# Altium PCB DS12C887.PcbDoc
Units mil, origin at the board's own origin, x right, y up, seen from the top; angles counter-clockwise.
Board outline 6000 x 4000 mil, 2 copper layers (Top Layer, Bottom Layer); 21 components, 31 nets, 133 pads, 3 vias.
Unrouted connection lines stored in the file: 1.
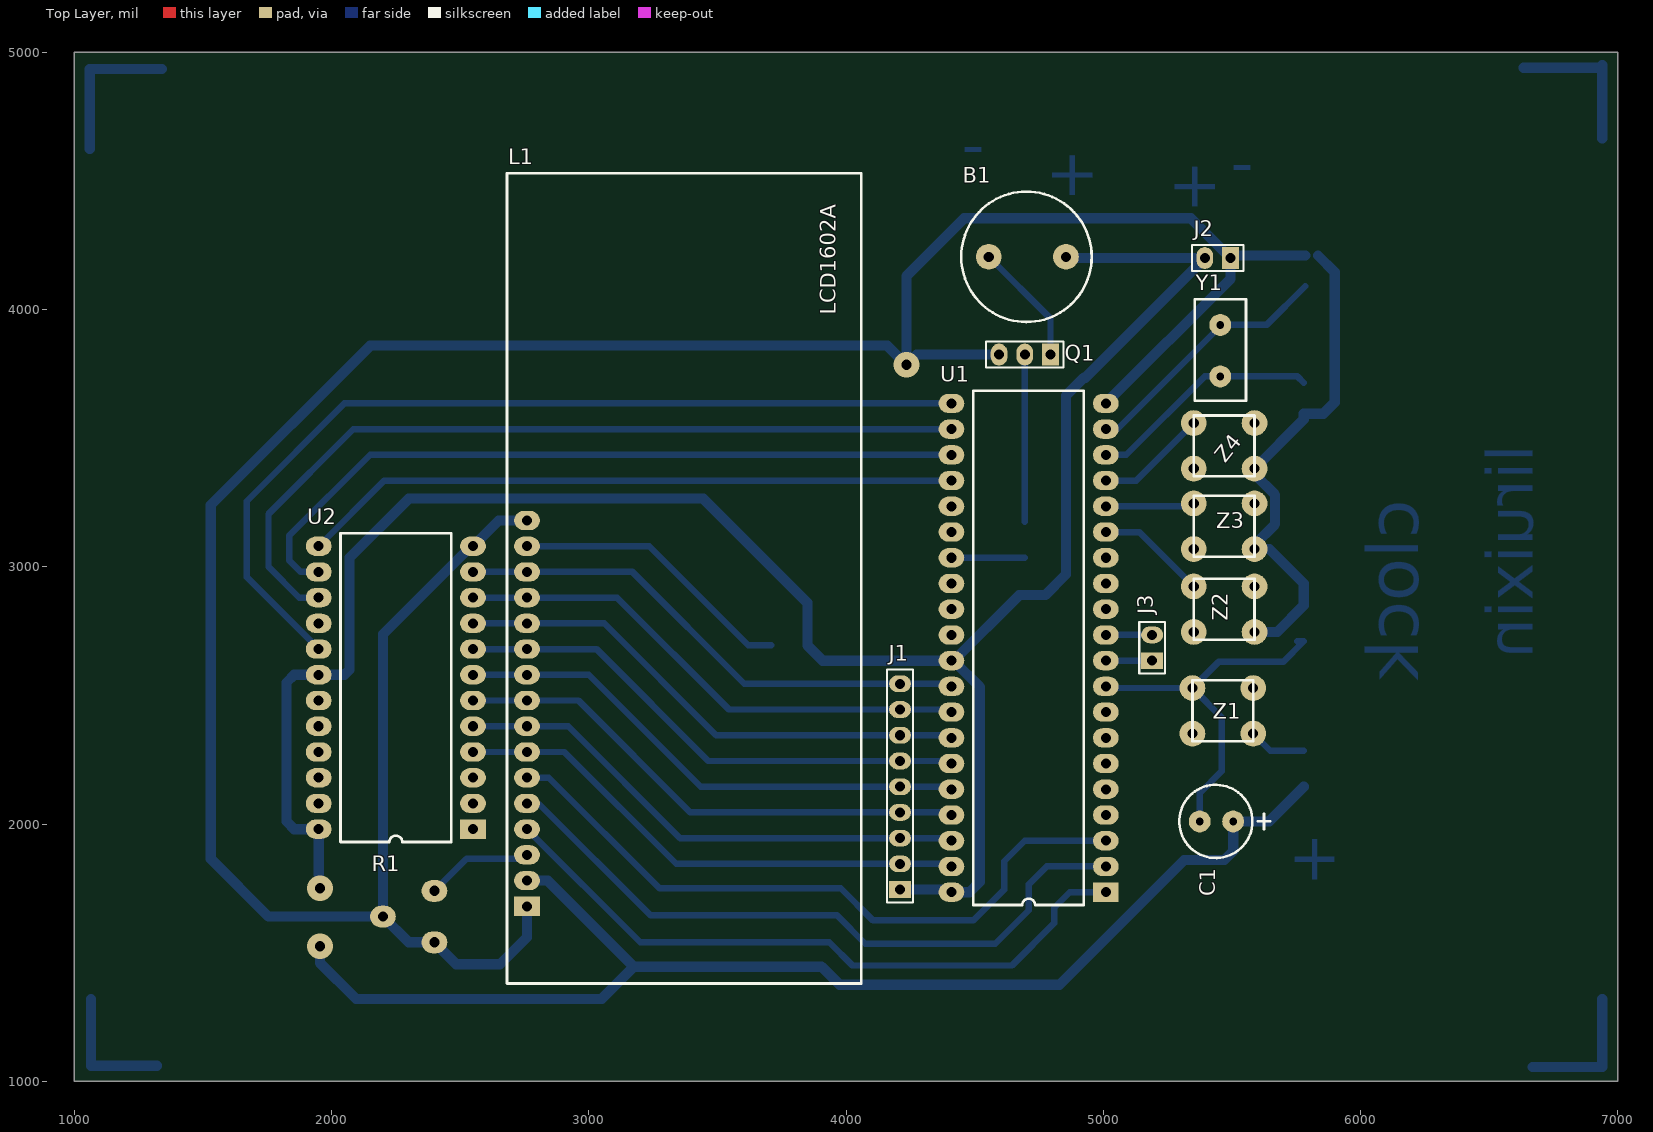
[diagram p0: Top Layer view]
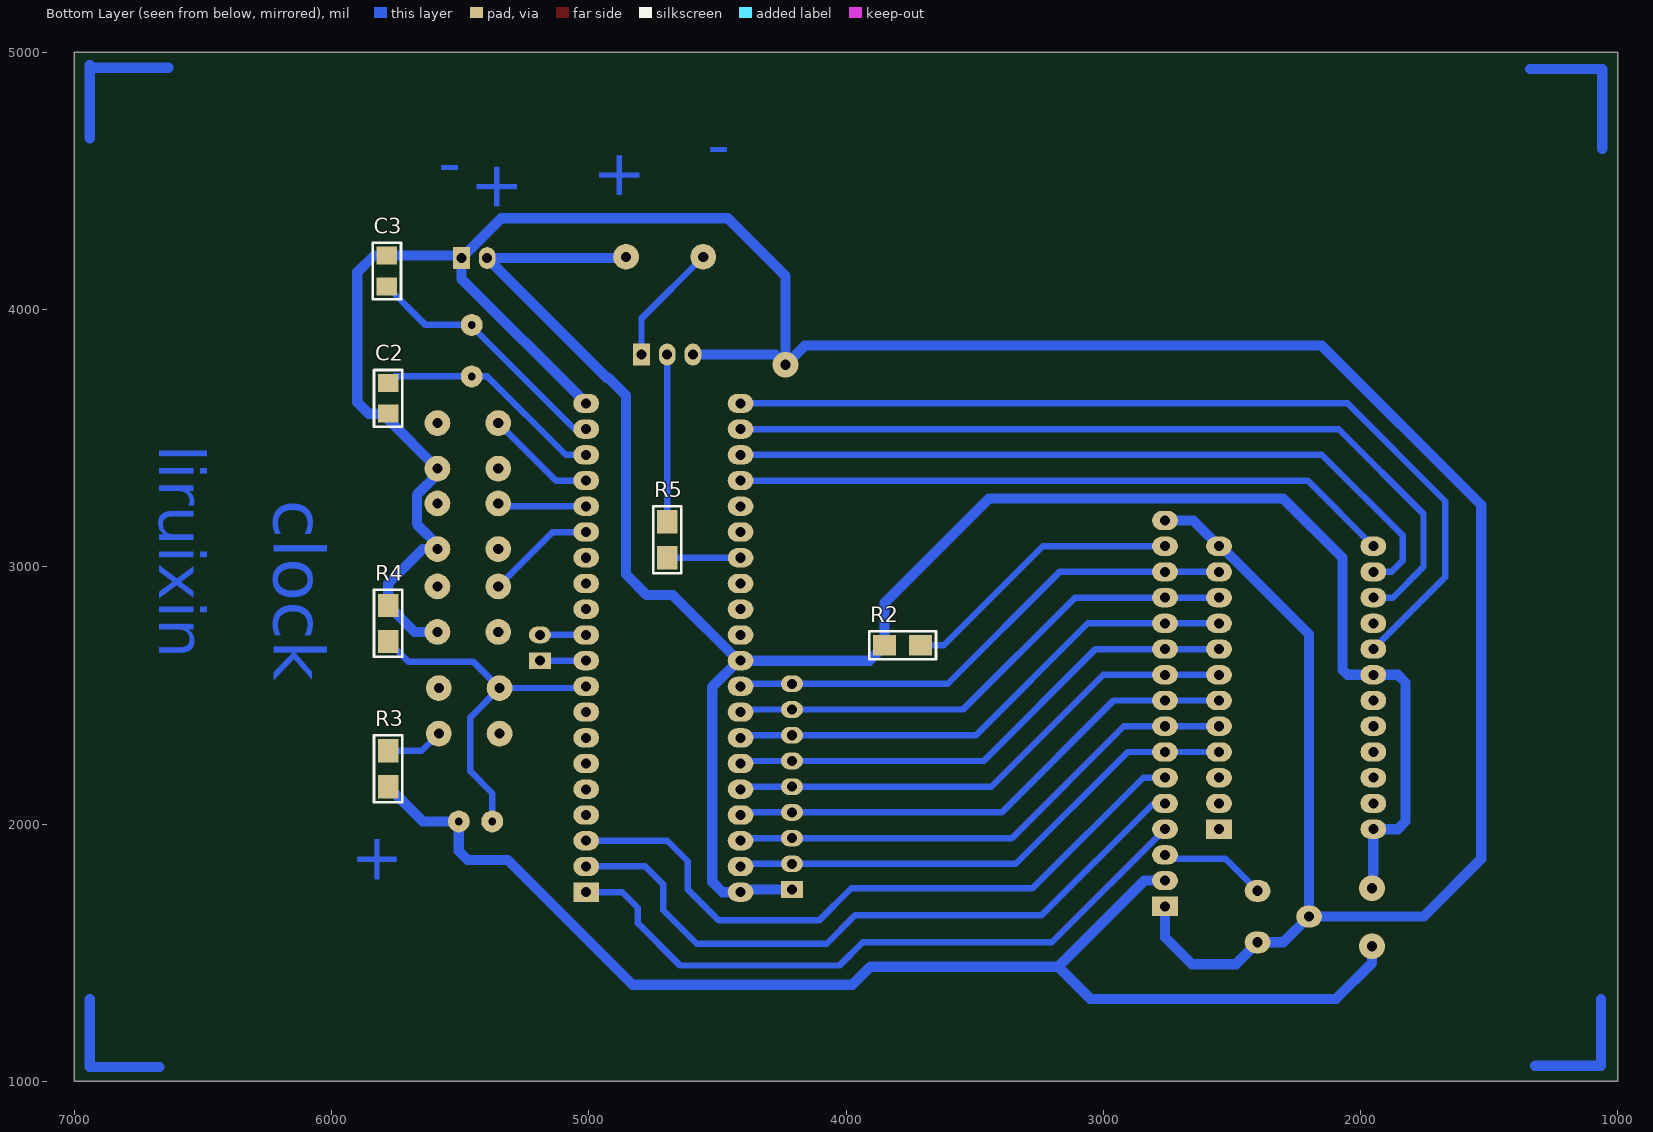
[diagram p1: Bottom Layer view, seen from below]

## Layer stack, top to bottom
Top Solder: solder mask 0.4, Solder Resist, Dk 3.5
Top Layer: signal copper 1.4
Dielectric 1: dielectric 12.6, FR-4, Dk 4.8
Bottom Layer: signal copper 1.4
Bottom Solder: solder mask 0.4, Solder Resist, Dk 3.5

## Board outline
1000,1000 7000,1000 7000,5000 1000,5000

## Design rules (kind name [scope] priority, off if disabled: settings)
Clearance [All] p1: gap=10
PolygonConnect [All] p1: connectstyle=Relief reliefconductorwidth=10 reliefentries=4 polygonreliefangle="90 Angle" airgapwidth=10
RoutingVias [All] p1: holewidth=28 width=50 viastyle="Through Hole" minholewidth=28 minwidth=50 maxholewidth=28 maxwidth=50
SolderMaskExpansion [All] p1: expansion=4
Width [All] p1: maxlimit=50 minlimit=20 preferedwidth=20
29 further rules are at their usual default settings.

## Components (designator, comment, footprint, x,y, rotation, side; value= is the part's Value field where it differs from the comment)
B1 "Buzzer" BUZZER 4695,4205 r0 top
C1 "CAP+" CAP+DIP 5440,2010 r180 top
C2 "CAP" CAP 5780,3660 r270 bottom
C3 "CAP" CAP 5785,4145 r90 bottom
J1 "Header1x9" HEADER1X9 4210,2145 r90 top
J2 "Header1x2" HEADER1X2 5445,4200 r180 top
J3 "Header1x2" HEADER1X2 5190,2685 r90 top
L1 "LCD1602A" LCD1602A 3360,2980 r90 top
Q1 "Header1x3" HEADER1X3 4695,3825 r180 top
R1 "RES-C" RES-Change-T 2300,1640 r90 top
R2 "RES" RES 3780,2695 r180 bottom
R3 "RES" RES 5780,2215 r270 bottom
R4 "RES" RES 5780,2780 r270 bottom
R5 "RES" RES 4695,3105 r90 bottom
U1 "89C51/52" DIP-40 4725,2680 r180 top
U2 "DS12C887" DIP-24 2260,2535 r180 top
Y1 "XTAL" XTAL 5460,3840 r270 top
Z1 "Button-Z" SW-PB-Z 5465,2440 r180 top
Z2 "Button-Z" SW-PB-Z 5470,2835 r180 top
Z3 "Button-Z" SW-PB-Z 5470,3157.5 r180 top
Z4 "Button-Z" SW-PB-Z 5470,3470 r180 top

## Footprints (in the part's own frame and the unit in brackets; to place one, negate y for a bottom-side part, rotate by r counter-clockwise, add the part's x,y. Pads: shape width x height; smd on the part's side, far side on the other; paste and mask are expansions set on the pad)
BUZZER [mil]
  round 100 hole 39: 1(-140,0) 2(160,0)
  silkscreen extent -247,-253 260,253
CAP [mil]
  rect 70x80 smd: 1(-55,0) 2(65,0)
  silkscreen extent -105,-55 115,55
CAP+DIP [mil]
  round 85 hole 30: 1(-65,0) 2(65,0)
  silkscreen extent -210,-142 144,142
DIP-24 [mil]
  rect 100x75 hole 39: 1(-290,555)
  oval 100x75 hole 39: 2(-290,455) 3(-290,355) 4(-290,255) 5(-290,155) 6(-290,55) 7(-290,-45) 8(-290,-145) 9(-290,-245) 10(-290,-345) 11(-290,-445) 12(-290,-545) 13(310,-545) 14(310,-445) 15(310,-345) 16(310,-245) 17(310,-145) 18(310,-45) 19(310,55) 20(310,155) 21(310,255) 22(310,355) 23(310,455) 24(310,555)
  silkscreen extent -205,-595 225,605
DIP-40 [mil]
  rect 100x75 hole 39: 1(-285,945)
  oval 100x75 hole 39: 2(-285,845) 3(-285,745) 4(-285,645) 5(-285,545) 6(-285,445) 7(-285,345) 8(-285,245) 9(-285,145) 10(-285,45) 11(-285,-55) 12(-285,-155) 13(-285,-255) 14(-285,-355) 15(-285,-455) 16(-285,-555) 17(-285,-655) 18(-285,-755) 19(-285,-855) 20(-285,-955) 21(315,-955) 22(315,-855) 23(315,-755) 24(315,-655) 25(315,-555) 26(315,-455) 27(315,-355) 28(315,-255) 29(315,-155) 30(315,-55) 31(315,45) 32(315,145) 33(315,245) 34(315,345) 35(315,445) 36(315,545) 37(315,645) 38(315,745) 39(315,845) 40(315,945)
  silkscreen extent -200,-1005 230,995
HEADER1X2 [mil]
  rect 65x85 hole 39: 1(-50,0)
  oval 65x85 hole 39: 2(50,0)
  silkscreen extent -100,-50 100,50
HEADER1X3 [mil]
  rect 65x85 hole 39: 1(-100,0)
  oval 65x85 hole 39: 2(0,0) 3(100,0)
  silkscreen extent -150,-50 150,50
HEADER1X9 [mil]
  rect 65x85 hole 39: 1(-400,0)
  oval 65x85 hole 39: 2(-300,0) 3(-200,0) 4(-100,0) 5(0,0) 6(100,0) 7(200,0) 8(300,0) 9(400,0)
  silkscreen extent -450,-50 455,50
LCD1602A [mil]
  rect 75x100 hole 39: 1(-1300,600)
  oval 75x100 hole 39: 2(-1200,600) 3(-1100,600) 4(-1000,600) 5(-900,600) 6(-800,600) 7(-700,600) 8(-600,600) 9(-500,600) 10(-400,600) 11(-300,600) 12(-200,600) 13(-100,600) 14(0,600) 15(100,600) 16(200,600)
  silkscreen extent -1600,-700 1550,678
RES [mil]
  rect 90x80 smd: 1(-70,0) 2(70,0)
  silkscreen extent -130,-55 130,55
RES-Change-T [mil]
  oval 85x100 hole 40: 1(-100,-100) 2(100,-100) 3(0,100)
SW-PB-Z [mm]
  round 2.54 hole 0.991: 1(-3,2.25) 2(3,-2.25) ""(-3,-2.25) ""(3,2.25)
  silkscreen extent -3,-3 3,3
XTAL [mil]
  round 85 hole 30: 1(-100,-5) 2(100,-5)
  silkscreen extent -200,-105 195,95

## Part data
C1: library part CAP+DIP
R1: library part RES-Change-T
Z1 Z2 Z3 Z4: library part SW-Button-Z

## Via types
v1: diameter 100, hole 40, Top Layer to Bottom Layer, 3 vias

## Nets (pads, with @x,y where several pads share a name; then routed paths per layer and width w, separated by ;. In a path a pad name is that pad's centre, name@x,y a point inside that pad or via, vN(x,y) a via of type N, cw(c..) or ccw(c..) an arc to the next point about the centre after c; other vN are vias at no path point)
AS: U1.23 U2.14 | length 2934.1
  Bottom Layer w25: U2.14 1880,2980 1835,3025 1835,3120 2150,3435 U1.23
CS: U1.24 U2.13 | length 2565.6
  Bottom Layer w25: U2.13 2205,3335 U1.24
D0: J1.2 L1.7 U1.39 U2.4 | length 2030.2
  Bottom Layer w25: U2.4 L1.7 2905,2280 3340,1845 J1.2 U1.39@4400,1845
D1: J1.3 L1.8 U1.38 U2.5 | length 2030.2
  Bottom Layer w25: U2.5 L1.8 2920,2380 3355,1945 J1.3 U1.38@4400,1945
D2: J1.4 L1.9 U1.37 U2.6 | length 2030.2
  Bottom Layer w25: U2.6 L1.9 2960,2480 3395,2045 J1.4 U1.37@4400,2045
D3: J1.5 L1.10 U1.36 U2.7 | length 2030.2
  Bottom Layer w25: U2.7 L1.10 3000,2580 3435,2145 J1.5 U1.36@4400,2145
D4: J1.6 L1.11 U1.35 U2.8 | length 2030.2
  Bottom Layer w25: U2.8 L1.11 3030,2680 3465,2245 J1.6 U1.35@4400,2245
D5: J1.7 L1.12 U1.34 U2.9 | length 2030.2
  Bottom Layer w25: U2.9 L1.12 3060,2780 3495,2345 J1.7 U1.34@4400,2345
D6: J1.8 L1.13 U1.33 U2.10 | length 2030.2
  Bottom Layer w25: U2.10 L1.13 3110,2880 3545,2445 J1.8 U1.33@4400,2445
D7: J1.9 L1.14 U1.32 U2.11 | length 2030.2
  Bottom Layer w25: U2.11 L1.14 3170,2980 3605,2545 J1.9 U1.32@4400,2545
DS: U1.21 U2.17 | length 3588.4
  Bottom Layer w25: U2.17 1670,2960 1670,3255 2050,3635 U1.21
EN: L1.6 U1.3 | length 2672.7
  Bottom Layer w25: L1.6 2845,2180 3275,1750 3980,1750 4105,1625 4495,1625 4615,1745 4615,1855 4695,1935 U1.3
GND: C2.2 C3.2 J2.1 L1.1 L1.16 Q1.3 R1.1 R1.3 R4.1 U1.20 U2.12 Z2.1 Z3.1 Z4.1 | length 12914.5
  Bottom Layer w40: L1.1 2760,1560 2655,1455 2485,1455 R1.1 2300,1540 R1.3 ; L1.16 2650,3180 U2.12 2542.04,3080 2200,2737.96 R1.3 ; Q1.3 4275,3825 v1(4235,3785) ; U1.20 5495,4120 J2.1 5340,4355 4460,4355 4235,4130 v1(4235,3785) ; J2.1@5505,4210 C3.2 ; Z2.1 5676.42,2746.42 R4.1 5780,2935 5646.08,3068.92 Z3.1 ; Z3.1@5588.11,3086.08 5668.11,3166.08 5668.11,3279.22 5588.11,3359.22 Z4.1 5780,3573.31 C2.2 5855,3595 5900,3640 5900,4145 5835,4210 ; R1.3 1755,1640 1530,1865 1530,3240 2150,3860 4160,3860 v1(4235,3785)
NetB1_1: B1.1 Q1.1 | length 479.4
  Bottom Layer w25: B1.1 4795,3965 Q1.1
NetC1_2: C1.2 R4.2 U1.9 Z1.2 | length 1464.4
  Bottom Layer w25: U1.9@5016.42,2528.58 Z1.2 ; C1.2 5375,2120 5460,2205 5460,2415.47 Z1.2 ; R4.2@5755,2710 R4.2 5700,2630 5448.31,2630 Z1.2
NetC2_1: C2.1 U1.18 Y1.2 | length 906.7
  Bottom Layer w25: U1.18 5090,3435 5395,3740 Y1.2 5755,3740 C2.1
NetC3_1: C3.1 U1.19 Y1.1 | length 1002.8
  Bottom Layer w25: U1.19 5055,3535 Y1.1@5455,3935 ; Y1.1 5635,3940 C3.1
NetL1_3: L1.3 R1.2 | length 396.8
  Bottom Layer w25: R1.2 2525,1865 L1.3@2745,1865
NetL1_15: L1.15 R2.2 | length 1109.5
  Bottom Layer w25: L1.15 3235,3080 3620,2695 R2.2
NetQ1_2: Q1.2 R5.2 | length 650
  Bottom Layer w25: R5.2 Q1.2
NetR3_1: R3.1 Z1.1 | length 224.4
  Bottom Layer w25: Z1.1 5649.53,2285 R3.1
NetR5_1: R5.1 U1.27 | length 285
  Bottom Layer w25: U1.27 R5.1
RS: L1.4 U1.1 | length 2622.7
  Bottom Layer w25: L1.4 3200,1540 3935,1540 4025,1450 4645,1450 4810,1615 4810,1675 4870,1735 U1.1
RW: L1.5 U1.2 | length 2658.6
  Bottom Layer w25: L1.5 2765,2075 2810,2075 3240,1645 3965,1645 4075,1535 4580,1535 4710,1665 4710,1765 4780,1835 U1.2
RWDS: U1.22 U2.15 | length 3241.4
  Bottom Layer w25: U2.15 1875,2880 1755,3000 1755,3205 2085,3535 U1.22
RXD: J3.1 U1.10 | length 180
  Bottom Layer w25: U1.10 J3.1
S1: U1.15 Z2.2 | length 429.5
  Bottom Layer w25: U1.15 5140.47,3135 Z2.2
S2: U1.16 Z3.2 | length 330.8
  Bottom Layer w25: U1.16 Z3.2@5340.81,3235
S3: U1.17 Z4.2 | length 434.5
  Bottom Layer w25: U1.17 5128.31,3335 Z4.2
TXD: J3.2 U1.11 | length 180
  Bottom Layer w25: U1.11 J3.2
VCC: B1.2 C1.1 J1.1 J2.2 L1.2 R2.1 R3.2 U1.31 U1.40 U2.18 U2.24 | length 13125.3
  Bottom Layer w40: 1950,1805 U2.24 1855,1980 1825,2010 1825,2550 1855,2580 U2.18 2050,2580 2070,2600 2070,3035 2300,3265 3445,3265 3850,2860 R2.1 3910,2635 U1.31 U1.31@4417.96,2635 ; v1(1955,1525) 1955,1460 2095,1320 3050,1320 3175,1445 ; L1.2 2840,1780 3175,1445 ; J1.1 4400,1745 U1.40 4480,1735 4520,1775 4520,2532.96 U1.31@4417.96,2635 ; B1.2 4860,4200 J2.2 4930,3735 ; 4925,3735 4855,3665 4855,2970 4775,2890 4672.96,2890 U1.31@4417.96,2635 ; R3.2 5645,2010 C1.1 5505,1895 5470,1860 5315,1860 4830,1375 3975,1375 3905,1445 3175,1445
  other v1: 1955,1750
pads on no net: U1.4 U1.5 U1.6 U1.7 U1.8 U1.12 U1.13 U1.14 U1.25 U1.26 U1.28 U1.29 U1.30 U2.1 U2.2 U2.3 U2.16 U2.19 U2.20 U2.21 U2.22 U2.23 Z1. Z2. Z3. Z4.
copper on no net: | length 2230
  Bottom Layer w40: 1060,4625 1060,4935 1340,4935 ; 1065,1320 1065,1060 1320,1060 ; 6635,4940 6940,4940 ; 6670,1055 6940,1055 6940,1320 ; 6940,4665 6940,4950

## Other copper
Bottom Layer:
  text "-" at 4450,4690 h180 r180
  text "+" at 4960,4625 h180 r90
  text "-" at 5495,4620 h180 r180
  text "+" at 5435,4580 h180 r90
  text "liruixin" at 6670,3475 h180 r90
  text "clock" at 6225,3260 h200 r90
  text "+" at 5720,1940 h180 r180